# Altium PCB ECAD_Clock.PcbDoc (part 2 of 2)
Units mm, origin at the board's own origin, x right, y up, seen from the top; angles counter-clockwise.
Board outline 71.5 x 59 mm, 4 copper layers (Component Side, Ground, Power, Solder Side), stack 1.597 mm thick; 117 components, 85 nets, 458 pads, 750 vias.
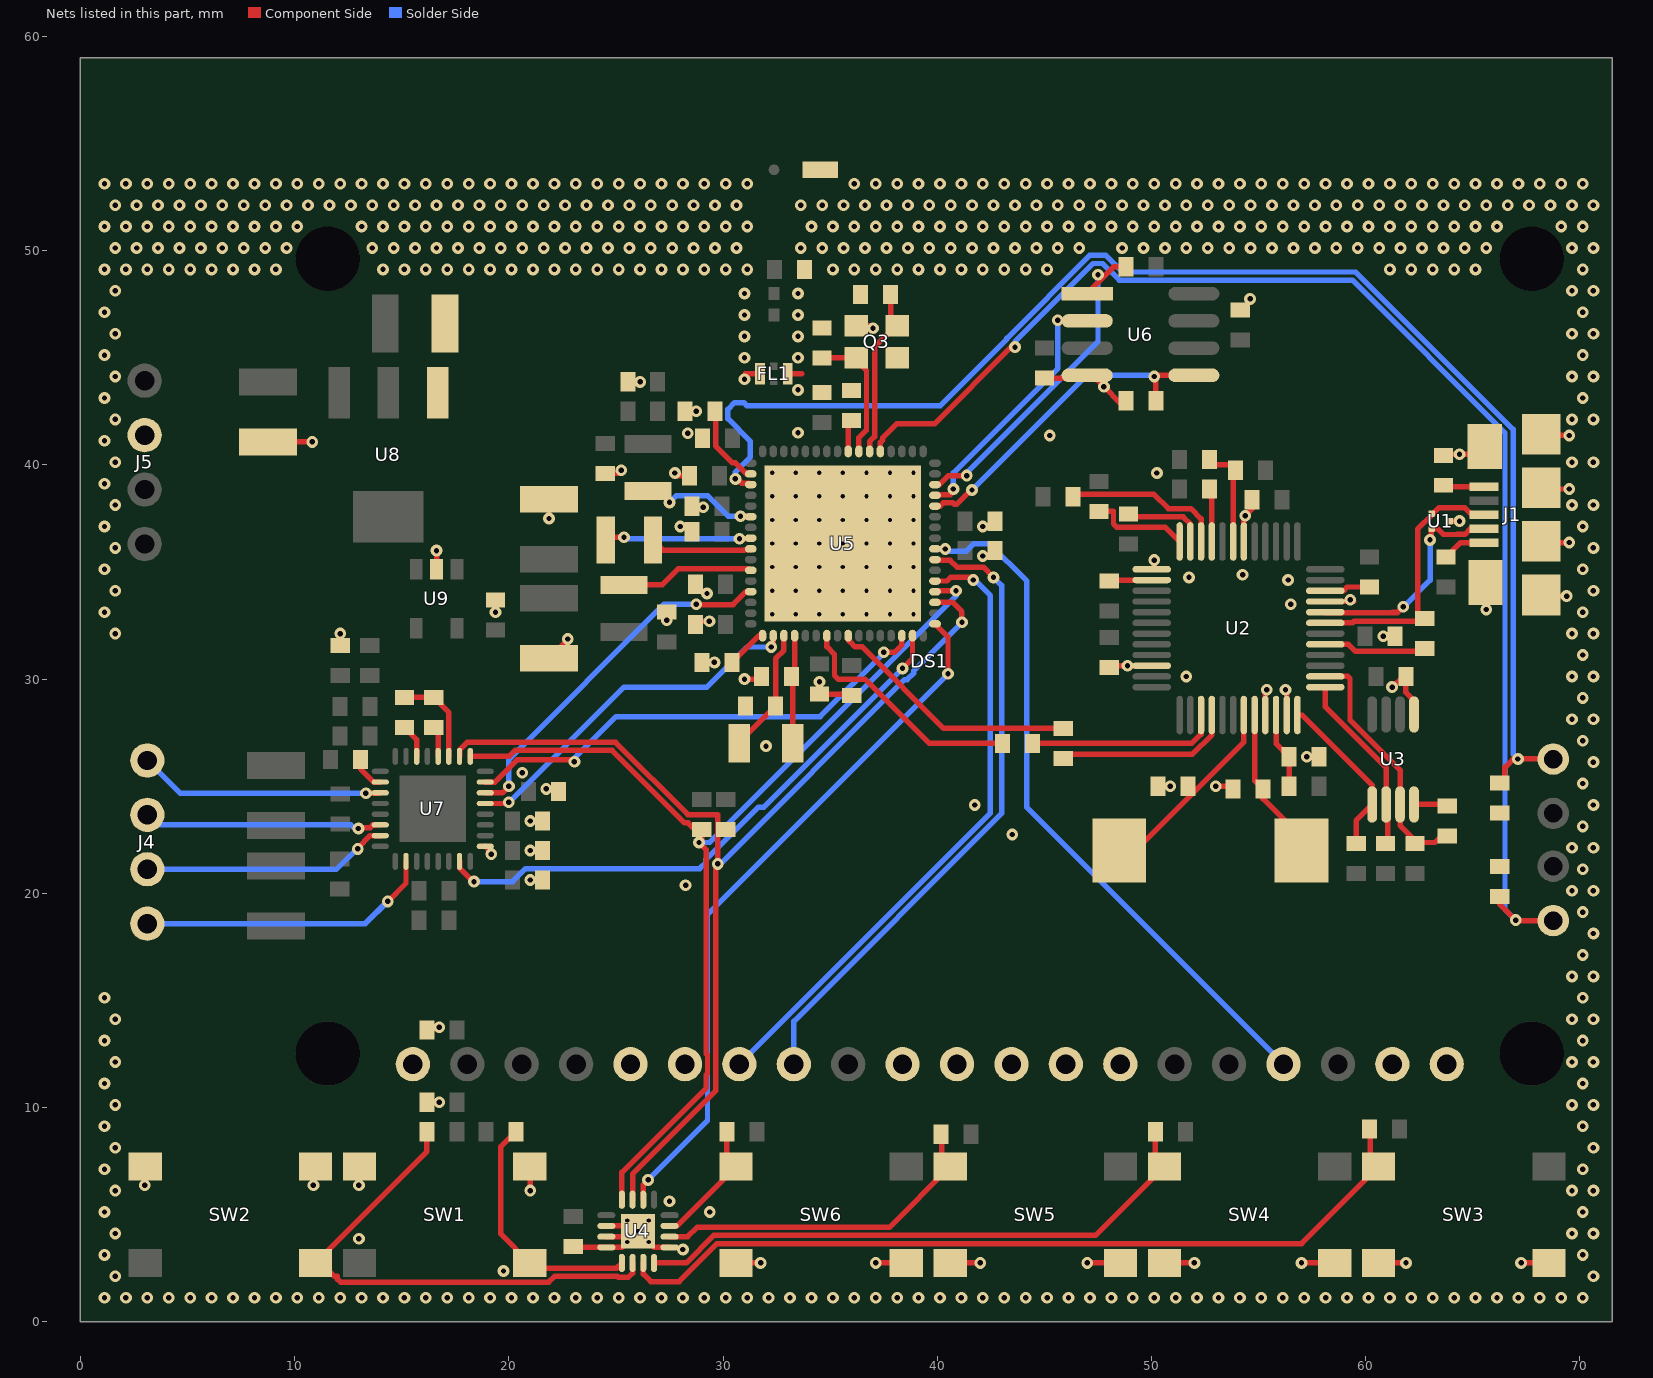
[diagram p4: the nets of this part, all layers, seen from the top]

## Via types
v1: diameter 0.55, hole 0.25, Component Side to Solder Side, tented both sides, 541 vias
v2: diameter 0.55, hole 0.25, Component Side to Solder Side, 146 vias
v3: diameter 0.5, hole 0.2, Component Side to Solder Side, tented both sides, 54 vias
v4: diameter 0.66, hole 0.33, Component Side to Solder Side, 9 vias

## Nets (pads, with @x,y where several pads share a name; then routed paths per layer and width w, separated by ;. In a path a pad name is that pad's centre, name@x,y a point inside that pad or via, vN(x,y) a via of type N, cw(c..) or ccw(c..) an arc to the next point about the centre after c; other vN are vias at no path point) (continued)
FLASH_CS: R20.2 U5.14 U6.1 | length 15.9
  Component Side w0.254: U5.14@39.892,39.08 40.095,39.08 40.515,39.5 v1(41.375,39.5) ; U6.1@46.997,47.992 48.255,49.25 R20.2@48.8,49.25
  Solder Side w0.254: v1(41.375,39.5) 41.375,39.641 47.5,45.766 v1(47.5,48.875)
FLASH_MISO: U5.13 U6.2 | length 10.9
  Component Side w0.254: U5.13@39.892,38.58 39.919,38.608 40.608,38.608 40.75,38.75 v1(40.75,38.875)
  Solder Side w0.254: v1(40.75,38.875) 40.75,39.625 45.625,44.5 v1(45.625,46.75)
FLASH_MOSI: R22.2 U5.12 U6.5 | length 15.9
  Component Side w0.254: U5.12@39.892,38.08 40.135,38.08 40.284,38.229 40.72,38.229 40.797,38.152 40.898,38.152 41.57,38.825 v1(41.62,38.825) ; R22.2@50.2,42.875 R22.2@50.2,43 50.2,44.075 50.307,44.182 U6.5@51.975,44.182
  Solder Side w0.254: v1(41.62,38.825) 46.972,44.177 50.073,44.177 v1(50.125,44.125)
FT_NRST: R6.2 R7.2 U2.19 | length 4.7
  Component Side w0.254: R6.2@52.7,40.25 52.95,40 53.675,40 53.811,39.864 U2.19@53.811,36.425
FT_RX: R11.2 U2.39 | length 8.9
  Component Side w0.254: R11.2@44.45,27 51.875,27 52.311,27.436 U2.39@52.311,28.325
FT_TCK: R2.2 U2.24 | length 4.7
  Component Side w0.254: R2.2@47.55,37.836 48.223,37.836 48.223,37.246 48.371,37.098 50.638,37.098 U2.24@51.311,36.425
FT_TDI: R4.2 U2.22 | length 7.6
  Component Side w0.254: R4.2@46.325,38.517 46.433,38.625 50.111,38.625 50.78,37.956 51.834,37.956 52.311,37.479 U2.22@52.311,36.425
FT_TDO: R3.2 U2.23 | length 3.9
  Component Side w0.254: R3.2@48.925,37.7 49.048,37.577 51.478,37.577 51.811,37.243 U2.23@51.811,36.425
FT_TMS: R5.2 U2.21 | length 2.5
  Component Side w0.254: R5.2@52.7,38.875 52.7,38.55 52.811,38.439 U2.21@52.811,36.425
FT_TX: R10.2 U2.40 | length 8.3
  Component Side w0.254: R10.2@45.875,26.3 46.075,26.5 51.911,26.5 52.811,27.4 U2.40@52.811,28.325
FT_XTALN: C6.1 Q1.2 U2.44 | length 7.2
  Component Side w0.254: U2.44@54.811,28.325 54.811,25.264 C6.1@55.2,24.875 55.2,24.425 57,22.625 Q1.2@57,22
FT_XTALP: C5.1 Q1.1 U2.43 | length 9.2
  Component Side w0.254: Q1.1@48.5,22 49.25,22 54.311,27.061 U2.43@54.311,28.325
GND: A1.2 C1.2 C2.2 C3.2 C4.2 C5.2 C6.2 C7.2 C8.2 C9.2 C10.2 C11.2 C12.2 C13.2 C14.2 C15.2 C16.2 C17.2 C18.2 C19.2 C20.2 C21.2 C22.2 C23.2 C24.2 C25.2 C26.2 C27.2 C28.2 C29.2 C30.2 C31.2 C33.2 C34.2 C35.2 C42.2 C43.2 C46.2 C47.2 C48.2 C49.2 C50.2 DS1.1 DS1.5 DS1.6 DS1.10 DS1.11 DS1.12 DS1.13 DS1.14 DS1.19 DS1.20 FIL2.1 FIL5.1 FL1.2 FL1.4 J1.SH J5.2 Q3.2 Q3.4 R21.1 R22.1 R23.2 R24.2 R25.2 SW1.2 SW1.4 SW2.2 SW2.4 SW3.2 SW3.4 SW4.2 SW4.4 SW5.2 SW5.4 SW6.2 SW6.4 U1.3 U2.9 U2.18 U2.25 U2.34 U2.45 U2.47 U3.5 U4.2 U4.3 U4.4 U4.9 U4.17 U5.65 U6.4 U7.1 U8.1 U9.2 | length 72.2
  Component Side w0.254: v2(3,6.375) 3,7.225 SW2.4@3.025,7.25 ; C33.2@8.75,41.075 v2(10.825,41.075) ; v2(10.875,6.375) 10.875,7.15 SW2.2@10.975,7.25 ; FIL5.1@12.125,31.575 v2(12.125,32.125) ; v2(13,6.375) 13,7.225 SW1.4@13.025,7.25 ; C30.2@16.175,10.25 v2(16.75,10.25) ; C31.2@16.175,13.625 16.3,13.5 16.55,13.75 v2(16.75,13.75) ; U9.2@16.625,35.125 v2(16.625,36) ; U7.1@18.898,22.195 19.218,21.875 v2(19.176,21.833) ; v2(19.375,33.125) C35.2@19.375,33.7 ; SW1.2@20.975,7.25 21,7.225 v2(21,6.125) ; v2(21,20.625) C47.2@21.575,20.625 ; v2(21,22) C46.2@21.575,22 ; v2(21,23.375) C42.2@21.575,23.375 ; v2(21.75,24.875) 22.2,24.875 C43.2@22.325,24.75 ; C49.2@21.875,30.975 22.75,31.85 v2(22.75,31.875) ; v2(21.875,37.5) C48.2@21.875,38.4 ; C8.2@23,3.525 23.05,3.475 U4.4@24.55,3.475 25.275,3.475 v3(26.025,4.225) ; C18.2@24.5,39.6 25.1,39.6 v2(25.25,39.75) ; U4.3@24.55,3.975 U4.17@25.525,3.975 ; U4.2@24.55,4.475 25.775,4.475 v3(26.025,4.225) ; C14.2@25.55,43.875 v2(26.125,43.875) ; C21.2@27.367,33.125 27.375,33.133 v2(27.375,32.75) ; U4.9@27.5,3.475 26.775,3.475 v3(26.525,3.725) v3(26.025,4.225) ; v2(27.75,39.625) 27.875,39.5 C16.2@28.425,39.5 ; R24.2@28.225,42.5 v2(28.75,42.5) ; C17.2@28.717,32.55 28.867,32.7 v2(29.362,32.7) ; C11.2@28.717,34.425 29.142,34 v2(29.25,34) ; C50.2@28.825,41.475 C50.2@29.05,41.25 ; C24.2@29.017,30.78 v2(29.595,30.78) ; SW6.2@30.6,2.75 v2(31.75,2.75) ; v2(31,30) 31.675,30 C26.2@31.8,30.125 ; v2@31.025,44.25 FL1.4@31.725,44.25 ; FL1.2@33.025,44.25 33.675,44.25 ; v2(34.5,29.875) C12.2@34.5,29.3 C23.2@36,29.3 ; Q3.2@36.225,46.5 36.875,46.5 v2(37,46.375) ; v2(37.125,2.75) SW6.4@38.55,2.75 ; SW5.2@40.6,2.75 v2(42,2.75) ; v2(42.125,35.75) 42.45,35.75 C22.2@42.7,36 ; v2(42.125,37.125) 42.45,37.125 C13.2@42.7,37.375 ; C20.2@45,44.05 46.865,44.05 U6.4@46.997,44.182 47.243,44.182 v2(47.775,43.65) 48.55,42.875 R22.1@48.8,42.875 ; v2(47,2.75) SW5.4@48.55,2.75 ; C2.2@48.025,30.55 48.1,30.625 v2(48.875,30.625) U2.34@50.011,30.625 ; U2.25@50.011,35.125 50.125,35.239 v2(50.125,35.557) ; C5.2@50.3,25 v2(50.875,25) ; SW4.2@50.6,2.75 v2(52,2.75) ; v2(53,25) C6.2@53.8,25 ; U2.18@54.311,36.425 54.311,37.561 v2(54.375,37.625) 54.7,37.95 C1.2@54.7,38.375 ; v2@54.6,47.6 v2(54.6,47.75) ; U2.45@55.311,28.325 55.311,29.436 v2(55.375,29.5) ; v2(56.25,29.5) 56.311,29.439 U2.47@56.311,28.325 ; v2(57,2.75) SW4.4@58.55,2.75 ; v2(57.25,26.375) C3.2@57.825,26.375 ; U2.9@58.111,33.625 59.45,33.625 59.373,33.702 v2(59.278,33.702) ; SW3.2@60.6,2.75 v2(61.875,2.75) ; v2(60.813,32) C4.2@61.375,32 ; v2(61.228,29.626) 61.251,29.626 61.75,30.125 C7.2@61.875,30.125 61.875,29.375 62.25,29 U3.5@62.25,28.35 ; FIL2.1@63.625,40.45 63.675,40.5 v2(64.375,40.5) 65.204,40.5 J1.SH@65.554,40.85 ; U1.3@63.954,37.404 U1.3@63.925,37.375 v2(64.375,37.375) ; J1.SH@65.584,34.5 65.625,34.459 v2(65.625,33.25) ; v2(67.25,2.75) SW3.4@68.55,2.75 ; J1.SH@68.194,33.925 68.244,33.875 v2(69.375,33.875) ; J1.SH@68.194,36.431 68.25,36.375 v2(69.5,36.375) ; J1.SH@68.194,38.931 68.25,38.875 v2(69.5,38.875) ; J1.SH@68.194,41.431 68.25,41.375 v2(69.5,41.375)
  other v1: 1.125,1.125 2.125,1.125 3.125,1.125 4.125,1.125 5.125,1.125 6.125,1.125 7.125,1.125 8.125,1.125 9.125,1.125 10.125,1.125 11.125,1.125 12.125,1.125 13.125,1.125 14.125,1.125 15.125,1.125 16.125,1.125 17.125,1.125 18.125,1.125 19.125,1.125 20.125,1.125 21.125,1.125 22.125,1.125 23.125,1.125 24.125,1.125 25.125,1.125 26.125,1.125 27.125,1.125 28.125,1.125 29.125,1.125 30.125,1.125 31.125,1.125 32.125,1.125 33.125,1.125 34.125,1.125 35.125,1.125 36.125,1.125 37.125,1.125 38.125,1.125 39.125,1.125 40.125,1.125 41.125,1.125 42.125,1.125 43.125,1.125 44.125,1.125 45.125,1.125 46.125,1.125 47.125,1.125 48.125,1.125 49.125,1.125 50.125,1.125 51.125,1.125 52.125,1.125 53.125,1.125 54.125,1.125 55.125,1.125 56.125,1.125 57.125,1.125 58.125,1.125 59.125,1.125 60.125,1.125 61.125,1.125 62.125,1.125 63.125,1.125 64.125,1.125 65.125,1.125 66.125,1.125 67.125,1.125 68.125,1.125 69.125,1.125 70.125,1.125 1.625,2.125 70.625,2.125 1.125,3.125 70.125,3.125 1.625,4.125 69.625,4.125 70.625,4.125 1.125,5.125 70.125,5.125 1.625,6.125 69.625,6.125 70.625,6.125 1.125,7.125 70.125,7.125 1.625,8.125 70.625,8.125 1.125,9.125 70.125,9.125 1.625,10.125 69.625,10.125 70.625,10.125 1.125,11.125 70.125,11.125 1.625,12.125 69.625,12.125 70.625,12.125 1.125,13.125 70.125,13.125 1.625,14.125 69.625,14.125 70.625,14.125 1.125,15.125 70.125,15.125 69.625,16.125 70.625,16.125 70.125,17.125 70.625,18.125 70.125,19.125 69.625,20.125 70.625,20.125 70.125,21.125 69.625,22.125 70.625,22.125 70.125,23.125 70.625,24.125 70.125,25.125 70.625,26.125 70.125,27.125 69.625,28.125 70.625,28.125 70.125,29.125 69.625,30.125 70.625,30.125 70.125,31.125 1.625,32.125 69.625,32.125 70.625,32.125 1.125,33.125 70.125,33.125 1.625,34.125 70.625,34.125 1.125,35.125 70.125,35.125 1.625,36.125 70.625,36.125 1.125,37.125 70.125,37.125 1.625,38.125 69.625,38.125 70.625,38.125 1.125,39.125 1.625,40.125 69.625,40.125 70.625,40.125 1.125,41.125 1.625,42.125 69.625,42.125 70.625,42.125 1.125,43.125 70.125,43.125 1.625,44.125 69.625,44.125 70.625,44.125 1.125,45.125 70.125,45.125 1.625,46.125 69.625,46.125 70.625,46.125 1.125,47.125 70.125,47.125 1.625,48.125 69.625,48.125 70.625,48.125 1.125,49.125 2.125,49.125 3.125,49.125 4.125,49.125 5.125,49.125 6.125,49.125 7.125,49.125 8.125,49.125 9.125,49.125 14.125,49.125 15.125,49.125 16.125,49.125 17.125,49.125 18.125,49.125 19.125,49.125 20.125,49.125 21.125,49.125 22.125,49.125 23.125,49.125 24.125,49.125 25.125,49.125 26.125,49.125 27.125,49.125 28.125,49.125 29.125,49.125 30.125,49.125 31.125,49.125 35.125,49.125 36.125,49.125 37.125,49.125 38.125,49.125 39.125,49.125 40.125,49.125 41.125,49.125 42.125,49.125 43.125,49.125 44.125,49.125 45.125,49.125 61.125,49.125 62.125,49.125 63.125,49.125 64.125,49.125 65.125,49.125 70.125,49.125 1.625,50.125 2.625,50.125 3.625,50.125 4.625,50.125 5.625,50.125 6.625,50.125 7.625,50.125 8.625,50.125 9.625,50.125 13.625,50.125 14.625,50.125 15.625,50.125 16.625,50.125 17.625,50.125 18.625,50.125 19.625,50.125 20.625,50.125 21.625,50.125 22.625,50.125 23.625,50.125 24.625,50.125 25.625,50.125 26.625,50.125 27.625,50.125 28.625,50.125 29.625,50.125 30.625,50.125 33.625,50.125 34.625,50.125 35.625,50.125 36.625,50.125 37.625,50.125 38.625,50.125 39.625,50.125 40.625,50.125 41.625,50.125 42.625,50.125 43.625,50.125 44.625,50.125 45.625,50.125 46.625,50.125 48.625,50.125 49.625,50.125 50.625,50.125 51.625,50.125 52.625,50.125 53.625,50.125 54.625,50.125 55.625,50.125 56.625,50.125 57.625,50.125 58.625,50.125 59.625,50.125 60.625,50.125 61.625,50.125 62.625,50.125 63.625,50.125 64.625,50.125 65.625,50.125 69.625,50.125 70.625,50.125 1.125,51.125 2.125,51.125 3.125,51.125 4.125,51.125 5.125,51.125 6.125,51.125 7.125,51.125 8.125,51.125 9.125,51.125 10.125,51.125 13.125,51.125 14.125,51.125 15.125,51.125 16.125,51.125 17.125,51.125 18.125,51.125 19.125,51.125 20.125,51.125 21.125,51.125 22.125,51.125 23.125,51.125 24.125,51.125 25.125,51.125 26.125,51.125 27.125,51.125 28.125,51.125 29.125,51.125 30.125,51.125 31.125,51.125 34.125,51.125 35.125,51.125 36.125,51.125 37.125,51.125 38.125,51.125 39.125,51.125 40.125,51.125 41.125,51.125 42.125,51.125 43.125,51.125 44.125,51.125 45.125,51.125 46.125,51.125 47.125,51.125 48.125,51.125 49.125,51.125 50.125,51.125 51.125,51.125 52.125,51.125 53.125,51.125 54.125,51.125 55.125,51.125 56.125,51.125 57.125,51.125 58.125,51.125 59.125,51.125 60.125,51.125 61.125,51.125 62.125,51.125 63.125,51.125 64.125,51.125 65.125,51.125 66.125,51.125 69.125,51.125 70.125,51.125 1.625,52.125 2.625,52.125 3.625,52.125 4.625,52.125 5.625,52.125 6.625,52.125 7.625,52.125 8.625,52.125 9.625,52.125 10.625,52.125 11.625,52.125 12.625,52.125 13.625,52.125 14.625,52.125 15.625,52.125 16.625,52.125 17.625,52.125 18.625,52.125 19.625,52.125 20.625,52.125 21.625,52.125 22.625,52.125 23.625,52.125 24.625,52.125 25.625,52.125 26.625,52.125 27.625,52.125 28.625,52.125 29.625,52.125 30.625,52.125 33.625,52.125 34.625,52.125 35.625,52.125 36.625,52.125 37.625,52.125 38.625,52.125 39.625,52.125 40.625,52.125 41.625,52.125 42.625,52.125 43.625,52.125 44.625,52.125 45.625,52.125 46.625,52.125 47.625,52.125 48.625,52.125 49.625,52.125 50.625,52.125 51.625,52.125 52.625,52.125 53.625,52.125 54.625,52.125 55.625,52.125 56.625,52.125 57.625,52.125 58.625,52.125 59.625,52.125 60.625,52.125 61.625,52.125 62.625,52.125 63.625,52.125 64.625,52.125 65.625,52.125 66.625,52.125 67.625,52.125 68.625,52.125 69.625,52.125 70.625,52.125 1.125,53.125 2.125,53.125 3.125,53.125 4.125,53.125 5.125,53.125 6.125,53.125 7.125,53.125 8.125,53.125 9.125,53.125 10.125,53.125 11.125,53.125 12.125,53.125 13.125,53.125 14.125,53.125 15.125,53.125 16.125,53.125 17.125,53.125 18.125,53.125 19.125,53.125 20.125,53.125 21.125,53.125 22.125,53.125 23.125,53.125 24.125,53.125 25.125,53.125 26.125,53.125 27.125,53.125 28.125,53.125 29.125,53.125 30.125,53.125 31.125,53.125 36.125,53.125 37.125,53.125 38.125,53.125 39.125,53.125 40.125,53.125 41.125,53.125 42.125,53.125 43.125,53.125 44.125,53.125 45.125,53.125 46.125,53.125 47.125,53.125 48.125,53.125 49.125,53.125 50.125,53.125 51.125,53.125 52.125,53.125 53.125,53.125 54.125,53.125 55.125,53.125 56.125,53.125 57.125,53.125 58.125,53.125 59.125,53.125 60.125,53.125 61.125,53.125 62.125,53.125 63.125,53.125 64.125,53.125 65.125,53.125 66.125,53.125 67.125,53.125 68.125,53.125 69.125,53.125 70.125,53.125
  other v2: 19.75,2.375 28.125,3.375 13,3.875 29.375,5.125 27.5,5.625 28.25,20.375 43.5,22.75 41.75,24.125 20.625,25.625 32,26.875 51.625,30.125 56.5,33.5 56.375,34.625 51.75,34.75 54.25,34.875 28,37.125 29.075,38.025 50.25,39.625 45.25,41.375 28.35,41.475 33.5,41.5 33.5,43.5 31,44 31,45 33.5,45 31,46 33.5,46 31,47 33.5,47 31,48 33.5,48
  other v3: 25.525,3.725 25.525,4.725 26.525,4.725 32.292,33.03 33.392,33.03 34.492,33.03 35.592,33.03 36.692,33.03 37.792,33.03 38.892,33.03 32.292,34.13 33.392,34.13 34.492,34.13 35.592,34.13 36.692,34.13 37.792,34.13 38.892,34.13 32.292,35.23 33.392,35.23 34.492,35.23 35.592,35.23 36.692,35.23 37.792,35.23 38.892,35.23 32.292,36.33 33.392,36.33 34.492,36.33 35.592,36.33 36.692,36.33 37.792,36.33 38.892,36.33 32.292,37.43 33.392,37.43 34.492,37.43 35.592,37.43 36.692,37.43 37.792,37.43 38.892,37.43 32.292,38.53 33.392,38.53 34.492,38.53 35.592,38.53 36.692,38.53 37.792,38.53 38.892,38.53 32.292,39.63 33.392,39.63 34.492,39.63 35.592,39.63 36.692,39.63 37.792,39.63 38.892,39.63
GSPI-CLK: DS1.7 U5.5 | length 29.9
  Component Side w0.254: U5.5@39.892,34.58 40.447,34.58 40.617,34.75 41.775,34.75 41.675,34.65 v1(41.675,34.625)
  Solder Side w0.254: DS1.7@30.76,12.025 42.475,23.74 42.475,33.9 41.75,34.625 v1(41.675,34.625)
GSPI-CS: DS1.17 U5.8 | length 32.2
  Solder Side w0.254: v1@40.375,36.119 40.382,36.119 40.526,35.975 41.352,35.975 41.702,36.325 42.42,36.325 44.175,34.57 44.175,24.01 DS1.17@56.16,12.025
  other v1: 40.375,36.075
GSPI-MOSI: DS1.8 U5.7 | length 30
  Component Side w0.254: U5.7@39.892,35.58 39.924,35.548 40.596,35.548 40.921,35.223 42.152,35.223 v1(42.625,34.75)
  Solder Side w0.254: DS1.8@33.3,12.025 33.3,14.029 43,23.729 43,34.375 v1(42.625,34.75)
I2C-SCL: R17.2 U4.15 U5.3 U7.10 | length 51.6
  Component Side w0.254: U7.10@17.698,26.395 17.698,26.703 18.046,27.051 24.98,27.051 28.358,23.673 29.75,23.673 v1(29.75,21.375) 29.651,21.276 29.651,10.776 25.775,6.9 U4.15@25.775,5.7 ; U5.3@39.892,33.58 39.91,33.598 40.698,33.598 41.15,33.146 v1(41.15,32.65)
  Solder Side w0.254: v1(29.75,21.375) 29.875,21.375 38.473,29.973 38.593,29.973 38.902,30.282 38.902,30.402 v1(41.15,32.65)
I2C-SDA: R18.2 U4.16 U5.4 U7.9 | length 50
  Component Side w0.254: U7.9@18.198,26.395 20.012,26.395 20.289,26.672 24.823,26.672 28.201,23.294 28.374,23.294 28.875,22.793 v1(28.875,22.375) ; U4.16@25.275,5.7 25.275,6.975 29.223,10.923 29.223,11.54 29.272,11.589 29.272,12.461 29.223,12.51 29.223,22.027 v1(28.875,22.375) ; R18.2@29,22.973 29,22.5 v1(28.875,22.375) ; U5.4@39.892,34.08 39.937,34.125 v1(40.875,34.125)
  Solder Side w0.254: v1(28.875,22.375) 29.37,22.375 40.875,33.88 v1(40.875,34.125)
KEY_INT: U4.14 U5.1 | length 33
  Component Side w0.254: U4.14@26.275,5.7 26.275,6.4 v1(26.5,6.625) ; U5.1@39.892,32.58 40.5,31.972 v1(40.5,30.25)
  Solder Side w0.254: v1(26.5,6.625) 29.25,9.375 29.272,9.375 29.272,19.022 v1(40.5,30.25)
MCASP-ACLKX: U5.62 U7.7 | length 22.7
  Component Side w0.254: U7.7@18.898,25.195 19.348,25.195 20.399,26.246 22.959,26.246 v1(23.06,26.145) ; v1(37.5,31.25) 38,31.25 38.342,31.592 U5.62@38.342,32.03
  Solder Side w0.254: v1(23.06,26.145) 23.06,26.31 25,28.25 31.467,28.25 31.469,28.248 34.531,28.248 37.5,31.217 v1(37.5,31.25)
MCASP-AFSX: U5.45 U7.6 | length 17
  Component Side w0.254: U7.6@18.898,24.695 19.695,24.695 v1(20,25) ; v1(28.75,33.5) 28.777,33.473 30.473,33.473 31.08,34.08 U5.45@31.292,34.08
  Solder Side w0.254: v1(20,25) 20,26.25 27.25,33.5 v1(28.75,33.5)
MCASP-D1: U5.50 U7.5 | length 16.9
  Component Side w0.254: U7.5@18.898,24.195 19.945,24.195 v1(20,24.25) ; v1(32.25,31.5) 32.342,31.592 U5.50@32.342,32.03
  Solder Side w0.254: v1(20,24.25) 25.375,29.625 29.25,29.625 31.125,31.5 v1(32.25,31.5)
MCASP-RESET: U5.63 U7.31 | length 27.2
  Component Side w0.254: U7.31@17.698,21.495 17.698,21.177 18.325,20.55 v1(18.375,20.55) ; v1(38.375,30.5) 38.842,30.967 U5.63@38.842,32.03
  Solder Side w0.254: v1(18.375,20.55) 20.18,20.55 20.782,21.152 28.907,21.152 29.223,21.468 29.223,21.593 31.657,24.027 31.902,24.027 v1(38.375,30.5)
NetC24_1: C24.1 U5.49 | length 1.9
  Component Side w0.254: C24.1@30.417,30.78 31.667,32.03 U5.49@31.842,32.03
NetC25_1: C25.1 U5.24 | length 1.5
  Component Side w0.254: U5.24@35.842,40.63 35.842,41.93 C25.1@35.992,42.08
NetC32_1: C32.1 R26.1 U7.11 | length 4.4
  Component Side w0.254: C32.1@15.125,29.145 R26.1@16.5,29.145 17.202,28.443 17.202,26.399 U7.11@17.198,26.395
NetC32_2: C32.2 U7.14 | length 1.6
  Component Side w0.254: C32.2@15.125,27.745 15.698,27.172 U7.14@15.698,26.395
NetFIL1_2: FIL1.2 J1.1 | length 2
  Component Side w0.254: FIL1.2@63.75,35.7 64.425,36.375 J1.1@65.519,36.375
NetFIL2_2: FIL2.2 J1.5 | length 2
  Component Side w0.254: FIL2.2@63.625,39.175 63.825,38.975 J1.5@65.519,38.975
NetFIL4_2: FIL4.2 U7.18 | length 1.6
  Component Side w0.254: FIL4.2@13.075,26.25 13.075,25.81 13.69,25.195 U7.18@13.998,25.195
NetL2_2: L2.2 U5.38 | length 4.8
  Component Side w0.254: L2.2@26.5,38.525 L2.2@26.994,38.525 ; v1(30.812,37.607) 30.839,37.58 U5.38@31.292,37.58
  Solder Side w0.254: v1(27.5,38.25) 27.802,38.552 29.293,38.552 30.238,37.607 v1(30.812,37.607)
NetL3_1: L3.1 U5.41 | length 4.8
  Component Side w0.254: L3.1@26.725,36.5 27.199,36.026 30.987,36.026 31.009,36.048 31.292,36.048 U5.41@31.292,36.08
NetL3_2: L3.2 U5.40 | length 6.9
  Component Side w0.254: L3.2@24.525,36.5 24.65,36.625 v1(25.375,36.625) ; v1(30.769,36.553) 31.265,36.553 U5.40@31.292,36.58
  Solder Side w0.254: v1(25.375,36.625) 25.447,36.553 v1(30.769,36.553)
NetL4_2: L4.2 U5.43 | length 6.3
  Component Side w0.254: L4.2@25.367,34.4 27.15,34.4 27.902,35.152 31.22,35.152 U5.43@31.292,35.08
NetR8_1: R8.1 U2.5 | length 5.1
  Component Side w0.254: U2.5@58.111,31.625 59.194,31.625 59.521,31.298 62.925,31.298 R8.1@62.925,31.425
NetR26_2: R26.2 U7.12 | length 1.4
  Component Side w0.254: R26.2@16.5,27.745 16.698,27.547 U7.12@16.698,26.395
RTC_XTAL_N: C26.1 Q2.1 U5.52 | length 5.1
  Component Side w0.254: Q2.1@33.25,27 33.25,30.075 C26.1@33.2,30.125 33.342,30.267 U5.52@33.342,32.03
RTC_XTAL_P: C27.1 Q2.2 U5.51 | length 5.9
  Component Side w0.254: Q2.2@30.75,27 30.75,27.05 C27.1@32.45,28.75 32.45,30.955 32.842,31.346 U5.51@32.842,32.03
SI/WUA: R9.2 U2.10 | length 2.1
  Component Side w0.254: U2.10@58.111,34.125 58.956,34.125 59.131,34.3 R9.2@60.175,34.3
SI/WUB: R15.2 U2.26 | length 2
  Component Side w0.254: R15.2@48.025,34.575 48.075,34.625 U2.26@50.011,34.625
SOP0: J2.2 R23.1 U5.35 | length 66.3
  Component Side w0.254: v2(30.575,39.347) 30.684,39.347 30.879,39.153 31.219,39.153 U5.35@31.292,39.08 ; R23.1@66.495,25.395 66.495,25.885 66.885,26.275 v1(67.1,26.275) 68.745,26.275 J2.2@68.75,26.27
  Solder Side w0.254: v2(30.575,39.347) 30.575,39.667 31.277,40.369 31.277,41.102 30.223,42.157 30.223,42.593 30.532,42.902 30.968,42.902 31.111,42.759 40.134,42.759 43.246,45.871 43.246,45.912 47.115,49.781 47.875,49.781 48.652,49.004 59.532,49.004 66.879,41.657 66.879,26.496 v1(67.1,26.275)
SOP1: R24.1 U5.34 | length 3.8
  Component Side w0.254: R24.1@29.625,42.5 29.652,42.5 29.652,40.892 30.445,40.098 30.569,40.098 31.015,39.653 31.042,39.653 31.077,39.618 31.077,39.593 31.09,39.58 U5.34@31.292,39.58
SOP2: J3.2 R25.1 U5.21 | length 62.6
  Component Side w0.254: U5.21@37.342,40.63 37.342,41.048 37.463,41.169 37.463,41.277 38.101,41.915 39.858,41.915 43.443,45.5 v1(43.625,45.5) ; R25.1@66.25,19.85 66.25,19.5 v1(67,18.75) 67.02,18.73 J3.2@68.75,18.73
  Solder Side w0.254: v1(43.625,45.5) 43.625,45.755 47.272,49.402 47.718,49.402 48.495,48.625 59.375,48.625 66.5,41.5 66.5,19.25 v1(67,18.75)
SPLM: J4.1 U7.19 | length 11.5
  Component Side w0.25: v2(13.325,24.675) 13.978,24.675 U7.19@13.998,24.695
  Solder Side w0.25: J4.1@3.125,26.205 4.655,24.675 v2(13.325,24.675)
SPLP: J4.2 U7.22 | length 11.2
  Component Side w0.25: v2(12.975,23.025) 13.02,23.07 13.525,23.07 13.65,23.195 U7.22@13.998,23.195
  Solder Side w0.25: J4.2@3.125,23.665 3.595,23.195 12.625,23.195 12.795,23.025 v2(12.975,23.025)
SPRM: J4.3 U7.23 | length 11.6
  Component Side w0.25: v2@12.95,22.125 13.52,22.695 U7.23@13.998,22.695 ; v2(12.951,22.076) v2@12.951,22.124
  Solder Side w0.25: J4.3@3.125,21.125 11.95,21.125 v2@12.95,22.125 ; v2(12.951,22.076) v2@12.951,22.124
SPRP: J4.4 U7.26 | length 15.4
  Component Side w0.25: v2(14.35,19.625) 15.198,20.473 U7.26@15.198,21.495
  Solder Side w0.25: J4.4@3.125,18.585 13.293,18.585 ; v2@14.342,19.633 13.293,18.585 ; v2(14.35,19.625) 13.31,18.585 13.293,18.585
SW_1: R27.2 SW1.1 U4.5 | length 11.5
  Component Side w0.254: R27.2@20.325,8.875 19.625,8.175 19.625,4.1 SW1.1@20.975,2.75 21.225,2.5 21.97,2.5 21.974,2.504 25.029,2.504 U4.5@25.275,2.75
SW_2: R28.2 SW2.1 U4.6 | length 24.2
  Component Side w0.254: R28.2@16.175,8.875 16.175,7.95 SW2.1@10.975,2.75 11.244,2.75 11.869,2.125 11.998,2.125 11.998,1.996 12.146,1.848 21.854,1.848 22.131,2.125 25.061,2.125 25.113,2.073 25.573,2.073 25.775,2.275 U4.6@25.775,2.75
SW_3: R29.2 SW3.1 U4.7 | length 39
  Component Side w0.254: U4.7@26.275,2.75 26.275,2.225 26.625,1.875 27.944,1.875 29.721,3.652 57.002,3.652 SW3.1@60.6,7.25 60.2,7.65 R29.2@60.2,8.875
SW_4: R30.2 SW4.1 U4.8 | length 27.5
  Component Side w0.254: U4.8@26.775,2.75 28.283,2.75 29.564,4.031 47.381,4.031 SW4.1@50.6,7.25 50.175,7.675 R30.2@50.175,8.875
SW_5: R31.2 SW5.1 U4.10 | length 16.2
  Component Side w0.254: U4.10@27.5,3.975 28.35,3.975 28.785,4.41 37.76,4.41 SW5.1@40.6,7.25 40.2,7.65 R31.2@40.2,8.875
SW_6: R32.2 SW6.1 U4.11 | length 6.1
  Component Side w0.254: U4.11@27.5,4.475 27.839,4.475 30.6,7.236 SW6.1@30.6,7.25 30.175,7.675 R32.2@30.175,8.875
UART0_RX: R10.1 U5.57 | length 12
  Component Side w0.254: U5.57@35.842,32.03 35.842,31.826 35.864,31.804 35.915,31.804 35.915,31.753 36.165,31.503 36.497,31.503 40.298,27.702 45.875,27.702 R10.1@45.875,27.7
UART0_TX: R11.1 U5.55 | length 11.2
  Component Side w0.254: U5.55@34.842,32.03 34.842,31.515 35.202,31.154 35.202,30.173 35.375,30 36.625,30 39.625,27 R11.1@43.05,27
USBAVCC: C3.1 R1.2 U2.46 | length 3.6
  Component Side w0.254: U2.46@55.811,28.325 55.811,26.989 C3.1@56.425,26.375 R1.2@56.425,25
USBDM: J1.2 U1.2 U2.8 | length 10.9
  Component Side w0.254: U2.8@58.111,33.125 58.138,33.098 61.473,33.098 61.5,33.125 ; 61.25,33.125 61.5,33.125 ; v1(61.75,33.375) 61.5,33.125 ; v1@63.052,36.5 63.052,37.002 U1.2@63.075,37.025 63.35,37.025 63.625,36.75 64.264,36.75 64.268,36.754 64.629,36.754 64.9,37.025 J1.2@65.519,37.025
  Solder Side w0.254: v1(61.75,33.375) 63,34.625 v1(63,36.5)
USBDP: J1.3 R8.2 U1.1 U2.7 | length 12.9
  Component Side w0.254: U2.7@58.111,32.625 59.375,32.625 59.452,32.702 62.802,32.702 62.425,33.079 62.425,37.002 U1.1@63.111,37.689 ; J1.3@65.519,37.675 64.938,37.675 64.613,38 63.423,38 U1.1@63.148,37.725 ; U1.1@63.111,37.689 U1.1@63.075,37.725 U1.1@63.148,37.725 ; U1.1@63.111,37.689 U1.1@63.148,37.725
USBEEPROM_CLK: R13.2 U2.1 U3.2 | length 8.5
  Component Side w0.254: U2.1@58.111,29.625 58.111,28.703 60.95,25.864 U3.2@60.95,24.15 61.025,24.075 R13.2@61.025,22.375
USBEEPROM_CS: R12.2 U2.48 U3.1 | length 7.9
  Component Side w0.254: U2.48@56.811,28.325 57.032,28.325 60.3,25.056 U3.1@60.3,24.15 59.55,23.4 R12.2@59.55,22.325
USBEEPROM_DI: R14.2 R16.1 U2.2 U3.3 | length 11.6
  Component Side w0.254: U2.2@58.111,30.125 59.165,30.125 59.263,30.027 59.263,28.087 61.6,25.75 U3.3@61.6,24.15 61.6,23.175 62.4,22.375 63.225,22.375 R16.1@63.662,22.812
USBEEPROM_DO: R16.2 U3.4 | length 1.6
  Component Side w0.254: U3.4@62.25,24.15 63.725,24.15 R16.2@63.8,24.075
WLAN_XTALN: C28.1 Q3.1 U5.22 | length 7.7
  Component Side w0.254: U5.22@36.842,40.63 36.842,41.084 37.073,41.315 37.073,45.501 Q3.1@37.917,46.345 ; Q3.1@37.792,46.47 37.817,46.495 C28.1@37.817,47.95
WLAN_XTALP: C29.1 Q3.3 U5.23 | length 6.3
  Component Side w0.254: C29.1@34.617,45 36.112,45 36.694,44.418 36.694,41.626 36.342,41.274 U5.23@36.342,40.63
pads on no net: DS1.3 DS1.9 DS1.15 DS1.18 DS1.21 J1.4 J5.3 J5.4 SW1.3 SW2.3 SW3.3 SW4.3 SW5.3 SW6.3 U2.11 U2.12 U2.13 U2.15 U2.16 U2.17 U2.20 U2.27 U2.28 U2.29 U2.30 U2.32 U2.33 U2.35 U2.36 U2.37 U2.38 U2.41 U3.6 U3.7 U4.12 U4.13 U5.6 U5.15 U5.18 U5.26 U5.27 U5.28 U5.29 U5.30 U5.46 U5.47 U5.53 U5.58 U5.59 U5.60 U5.61 U7.4 U7.8 U7.13 U7.15 U7.27 U7.30 U7.32 U9.4
copper on no net:
  other v2: 25.375,17.5

## Polygon pours and split planes (outlines as drawn)
AGND on Ground "Analog Ground" (solid, pour order 22): 0,30.75 18.25,30.75 18.25,15.625 0,15.625
GND on Ground "Ground" (solid, pour order 30): 0,53.75 71.5,53.75 71.5,0 0,0
AGND on Solder Side "Analog Ground, bottom layer" (solid, pour order 23): 0,30.75 18.25,30.75 18.25,15.625 0,15.625
GND on Solder Side "Digital round, solder side" (solid, pour order 32): 0,53.75 71.5,53.75 71.5,0 0,0
+3.3VD on Power "+3.3VD" (solid, pour order 29): 2.5,2.5 2.5,48.025 69,48.025 69,2.5
+1.8VD on Power "+1.8VD" (solid, pour order 25): 14.625,33.625 22,33.625 22,22.625 18.375,22.625 18.375,30.875 14.625,30.875 14.625,33.625
+3.3VA on Power "+3.3VA" (solid, pour order 27): 2.5,30.75 18.25,30.75 18.25,15.625 2.5,15.625
+5.0VA on Power "+5.0VA" (solid, pour order 26): 2.5,45.25 12.75,45.25 12.75,15.625 2.5,15.625
+5.0VBUS on Power "+5.0VBUS" (solid, pour order 28): 53.25,27 53.25,31 53.25,32.625 56.75,32.625 60.875,32.625 62.875,32.625 62.875,35.25 63.5,35.25 65.5,35.25 65.5,33 65.5,31.375 64.5,31.375 57.375,31.375 57.375,27.125 58.875,27.125 58.875,23.5 57.25,23.5 53.25,23.5
GND on Component Side "Digital round, component side" (solid, pour order 31): 0,53.75 71.5,53.75 71.5,0 0,0
AGND on Component Side "Analog ground, component side" (solid, pour order 24): 0,30.75 18.25,30.75 18.25,15.625 0,15.625

## Silkscreen, mask and mechanical layers (free items; w line width, h text height)
Top Overlay:
  text "WLAN-Clock / Lars Haulin HT 2016" at 24,16 h1.52

## Text inside footprints (layer, text, board x,y; h text height)
DS1: Top Overlay "20" at 62.95,9.825 h1; Top Overlay "1" at 15.35,9.825 h1